# Altium PCB connector_pcb.PcbDoc
Units mm, origin at the board's own origin, x right, y up, seen from the top; angles counter-clockwise.
Board outline 127 x 38.1 mm, 2 copper layers (Top Layer, Bottom Layer); 77 components, 40 nets, 197 pads, 0 vias.
Unrouted connection lines stored in the file: 144.
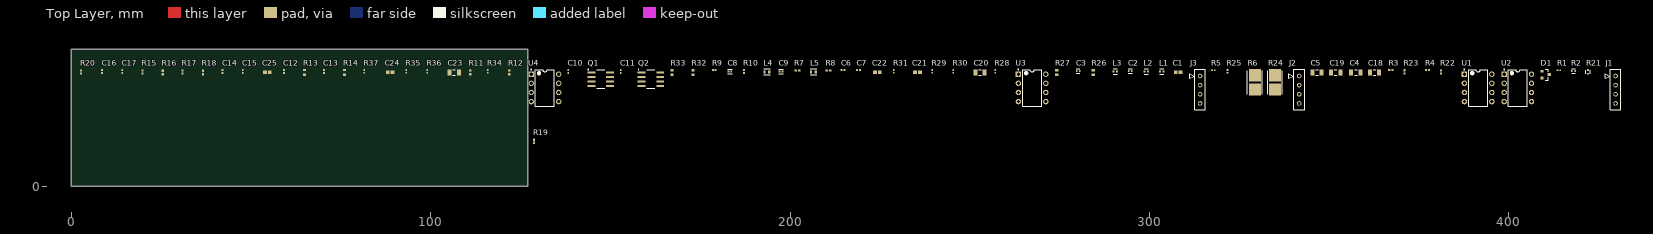
[diagram p0: Top Layer view]
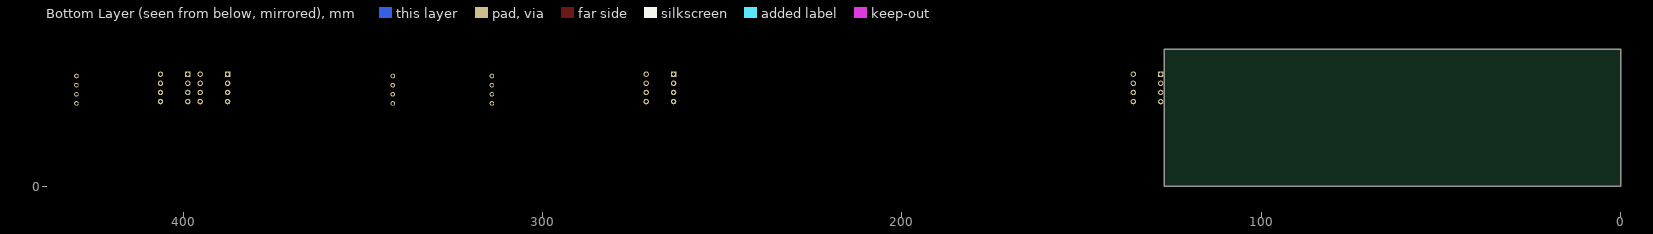
[diagram p1: Bottom Layer view, seen from below]

## Layer stack, top to bottom
Top Solder: solder mask 0.0102, Solder Resist, Dk 3.5
Top Layer: signal copper 0.0356
Dielectric 1: dielectric 0.32, FR-4, Dk 4.8
Bottom Layer: signal copper 0.0356
Bottom Solder: solder mask 0.0102, Solder Resist, Dk 3.5

## Board outline
0,0 127,0 127,38.1 0,38.1

## Design rules (kind name [scope] priority, off if disabled: settings)
Clearance [All] p1: gap=0.254 ignorepadtopadclearanceinfootprint=FALSE
PolygonConnect [All] p1: connectstyle=Relief reliefconductorwidth=0.254 reliefentries=4 polygonreliefangle="90 Angle" airgapwidth=0.254
RoutingVias [All] p1: holewidth=0.711 width=1.27 viastyle="Through Hole" minholewidth=0.711 minwidth=1.27 maxholewidth=0.711 maxwidth=1.27
SolderMaskExpansion [All] p1: expansion=0.102 istentingtop=FALSE
SupplyNets "Schematic Supply Nets_1" [InNet('GND')] p1: voltage=0.000
Width [All] p1: maxlimit=0.254 minlimit=0.254 preferedwidth=0.254
30 further rules are at their usual default settings.

## Components (designator, comment, footprint, x,y, rotation, side; value= is the part's Value field where it differs from the comment)
C1 "100p" CAPC1608X90X40ML10T20 307.975,31.623 r0 top
C2 "390p" FP-GRM155-0_05-MFG 294.64,32.004 r0 top
C3 "390p" FP-GRM155-0_05-MFG 280.162,32.004 r0 top
C4 "1u" CAPC3216X110X50LL20T25 357.378,31.623 r0 top
C5 "1u" CAPC3216X110X50LL20T25 346.583,31.623 r0 top
C6 "0.01u" CAPC1005X55X25LL05T10 214.757,32.258 r0 top
C7 "0.01u" CAPC1005X55X25LL05T10 219.075,32.258 r0 top
C8 "0.1u" FP-CL17-IPC_C 183.261,31.877 r0 top
C9 "0.1u" FP-CL17-IPC_C 197.485,31.877 r0 top
C10 "0.01u" CAPC1005X55X25LL05T10 138.303,31.877 r90 top
C11 "0.01u" CAPC1005X55X25LL05T10 152.908,31.877 r90 top
C12 "0.01u" CAPC1005X55X25LL05T10 59.182,31.877 r90 top
C13 "0.01u" CAPC1005X55X25LL05T10 70.358,31.877 r90 top
C14 "0.01u" CAPC1005X55X25LL05T10 42.164,31.877 r90 top
C15 "0.01u" CAPC1005X55X25LL05T10 47.752,31.877 r90 top
C16 "0.01u" CAPC1005X55X25LL05T10 8.636,31.877 r90 top
C17 "0.01u" CAPC1005X55X25LL05T10 14.224,31.877 r90 top
C18 "1u" CAPC3216X110X50LL20T25 362.585,31.623 r0 top
C19 "1u" CAPC3216X110X50LL20T25 351.79,31.623 r0 top
C20 "1u" CAPC3216X110X50LL20T25 252.857,31.623 r0 top
C21 "100p" CAPC1608X90X40ML10T20 235.458,31.623 r0 top
C22 "100p" CAPC1608X90X40ML10T20 224.282,31.623 r0 top
C23 "1u" CAPC3216X110X50LL20T25 106.553,31.623 r0 top
C24 "100p" CAPC1608X90X40ML10T20 88.773,31.623 r0 top
C25 "100p" CAPC1608X90X40ML10T20 54.61,31.623 r0 top
D1 "BAT54S-7-F" FP-SOT23-MFG 410.21,30.988 r0 top
J1 "PPTC041LFBN-RC" CONN_PPTC041LFBN-RC_SUL 429.641,30.607 r90 top
J2 "PPTC041LFBN-RC" CONN_PPTC041LFBN-RC_SUL 341.63,30.607 r90 top
J3 "PPTC041LFBN-RC" CONN_PPTC041LFBN-RC_SUL 314.071,30.607 r90 top
L1 "2u" FP-LQW15CA_00-MFG 303.403,31.877 r0 top
L2 "500n" FP-LQW15CA_00-MFG 299.085,31.877 r0 top
L3 "500n" FP-LQW15CA_00-MFG 290.449,31.877 r0 top
L4 "390n" FP-LQW18AN_00-MFG 193.548,31.75 r0 top
L5 "390n" FP-LQW18AN_00-MFG 206.502,31.75 r0 top
Q1 "HFA3101BZ" M8_15_MFG 147.32,29.718 r0 top
Q2 "HFA3101BZ" M8_15_MFG 161.29,29.718 r0 top
R1 "24" RESC1005X40X25LL05T10 413.893,32.258 r0 top
R2 "3.3k" FP-ERA2A-MFG 417.957,32.004 r0 top
R3 "75k" RESC1005X40X25NL10T10 367.157,32.258 r0 top
R4 "100" RESC1005X40X25NL05T10 377.317,32.258 r0 top
R5 "1k" RESC1005X40X25LL05T10 317.754,32.258 r0 top
R6 "50" FP-ALN2512-MFG 329.311,28.829 r90 top
R7 "51" RESC1005X40X25ML05T10 202.057,32.131 r0 top
R8 "51" RESC1005X40X25ML05T10 210.693,32.131 r0 top
R9 "2k" RESC1005X40X25LL10T10 178.943,32.258 r0 top
R10 "2k" RESC1005X40X25LL10T10 187.198,31.877 r90 top
R11 "110" RESC1005X40X25ML05T05 110.998,31.623 r90 top
R12 "110" RESC1005X40X25ML05T05 121.92,31.623 r90 top
R13 "300" RESC1608X55X25LL10T15 64.897,31.623 r90 top
R14 "300" RESC1608X55X25LL10T15 76.073,31.623 r90 top
R15 "220" RESC1005X40X25NL05T10 19.812,31.75 r90 top
R16 "51" RESC1005X40X25ML05T10 25.527,31.623 r90 top
R17 "220" RESC1005X40X25NL05T10 30.988,31.75 r90 top
R18 "51" RESC1005X40X25ML05T10 36.703,31.623 r90 top
R19 "27" RESC1005X40X25NL05T10 128.778,12.446 r90 top
R20 "27" RESC1005X40X25NL05T10 2.794,31.75 r90 top
R21 "3.3k" FP-ERA2A-MFG 422.021,31.75 r90 top
R22 "100" RESC1005X40X25NL05T10 381.127,31.75 r90 top
R23 "75k" RESC1005X40X25NL10T10 370.967,31.75 r90 top
R24 "50" FP-ALN2512-MFG 334.899,28.829 r90 top
R25 "1k" RESC1005X40X25LL05T10 321.691,31.877 r90 top
R26 "5.9k" RESC1608X55X30LL15T15 284.353,31.623 r90 top
R27 "5.9k" RESC1608X55X30LL15T15 274.193,31.623 r90 top
R28 "10k" RESC1005X40X25LL05T10 257.048,31.877 r90 top
R29 "10k" RESC1005X40X25LL05T10 239.522,31.877 r90 top
R30 "10k" RESC1005X40X25LL05T10 245.364,31.877 r90 top
R31 "10k" RESC1005X40X25LL05T10 228.854,31.877 r90 top
R32 "5.9k" RESC1608X55X30LL15T15 172.974,31.623 r90 top
R33 "5.9k" RESC1608X55X30LL15T15 167.132,31.623 r90 top
R34 "10k" RESC1005X40X25LL05T10 115.951,31.877 r90 top
R35 "10k" RESC1005X40X25LL05T10 93.218,31.877 r90 top
R36 "10k" RESC1005X40X25LL05T10 99.06,31.877 r90 top
R37 "10k" RESC1005X40X25LL05T10 81.534,31.877 r90 top
U1 "LM741CN/NOPB" P0008A 391.414,27.305 r0 top
U2 "LM741CN/NOPB" P0008A 402.463,27.305 r0 top
U3 "LM741CN/NOPB" P0008A 267.335,27.305 r0 top
U4 "LM741CN/NOPB" P0008A 131.826,27.305 r0 top

## Footprints (in the part's own frame and the unit in brackets; to place one, negate y for a bottom-side part, rotate by r counter-clockwise, add the part's x,y. Pads: shape width x height; smd on the part's side, far side on the other; paste and mask are expansions set on the pad)
CAPC1005X55X25LL05T10 [mm] "Chip Capacitor, 2-Leads, Body 1.05x0.55mm, IPC High Density"
  rect 0.56x0.52 smd: 1(-0.39,0) 2(0.39,0)
  body extent -0.53,-0.28 0.53,0.28, height 0.55
CAPC1608X90X40ML10T20 [mm] "Chip Capacitor, 2-Leads, Body 1.7x0.9mm, IPC Low Density"
  rect 1.05x1.05 smd: 1(-0.675,0) 2(0.675,0)
  body extent -0.85,-0.45 0.85,0.45, height 0.9
CAPC3216X110X50LL20T25 [mm] "Chip Capacitor, 2-Leads, Body 3.20x1.60mm, IPC High Density"
  rect 1.1x1.7 smd: 1(-1.3,0) 2(1.3,0)
  silkscreen extent -0.35,-0.75 0.35,0.75, body extent -1.7,-0.9 1.7,0.9, height 1.1
CONN_PPTC041LFBN-RC_SUL [mil]
  round 50 / inner round 60 / far side round 50 hole 30 paste-99999 mask+0: 1(0,0) 2(-100,0) 3(-200,0) 4(-300,0)
  silkscreen extent -372,-59 72,114
FP-ALN2512-MFG [mm]
  rect 3.4x3.3 smd paste+0 mask+0: 1(-2.005,0) 2(2.005,0)
  silkscreen extent -3.25,-2.09 3.24,2.07, body extent -3.8,-1.75 3.8,1.75, height 0.25
FP-CL17-IPC_C [mm]
  rect 0.515x0.472 smd paste+0 mask+0: 1(-0.379,0) 2(0.379,0)
  silkscreen extent -0.64,-0.67 0.64,0.67, body extent -0.74,-0.38 0.74,0.38, height 0.25
FP-ERA2A-MFG [mm]
  rect 0.475x0.5 smd paste+0 mask+0: 1(-0.512,0) 2(0.512,0)
  silkscreen extent -0.5,-0.63 0.5,0.63, body extent -0.85,-0.4 0.85,0.4, height 0.25
FP-GRM155-0_05-MFG [mm]
  rect 0.4x0.5 smd paste+0 mask+0: 1(-0.4,0) 2(0.4,0)
  silkscreen extent -0.5,-0.65 0.5,0.65, body extent -0.7,-0.38 0.7,0.38, height 0.25
FP-LQW15CA_00-MFG [mm]
  rect 0.5x0.64 smd paste+0 mask+0: 1(-0.475,0) 2(0.475,0)
  silkscreen extent -0.56,-0.72 0.56,0.72, body extent -0.82,-0.42 0.82,0.42, height 0.25
FP-LQW18AN_00-MFG [mm]
  rect 0.625x0.85 smd paste+0 mask+0: 1(-0.663,0) 2(0.663,0)
  silkscreen extent -0.9,-0.82 0.9,0.82, body extent -1.07,-0.6 1.07,0.6, height 0.25
FP-SOT23-MFG [mm]
  rect 0.9x0.8 smd paste+0 mask+0: 1(-1,0.95) 2(-1,-0.95) 3(1,0)
  silkscreen extent -0.18,-1.5 0.7,1.5, body extent -1.55,-1.6 1.55,1.6, height 0.25
M8_15_MFG [mm] "Recommended Land Pattern"
  rect 2.2x0.6 smd: 1(-2.6,1.905) 2(-2.6,0.635) 3(-2.6,-0.635) 4(-2.6,-1.905) 5(2.6,-1.905) 6(2.6,-0.635) 7(2.6,0.635) 8(2.6,1.905)
  silkscreen extent -3.57,-2.56 1.12,2.83, body extent -3.8,-2.75 3.8,2.75, height 0.25
P0008A [mm] "DIP, 8-Leads, Body 10.15x6.6mm, Pitch 2.54mm"
  rect 1.5x1.5 hole 0.9: 1(-3.81,3.81)
  round 1.5 hole 0.9: 2(-3.81,1.27) 3(-3.81,-1.27) 4(-3.81,-3.81) 5(3.81,-3.81) 6(3.81,-1.27) 7(3.81,1.27) 8(3.81,3.81)
  silkscreen extent -3.93,-5.1 2.65,5.23, body extent -3.95,-5.07 3.95,5.07, height 5.08
RESC1005X40X25LL05T10 [mm] "Chip Resistor, 2-Leads, Body 1.00x0.50mm, IPC High Density"
  rect 0.5x0.45 smd: 1(-0.375,0) 2(0.375,0)
  body extent -0.53,-0.27 0.53,0.28, height 0.4
RESC1005X40X25LL10T10 [mm] "Chip Resistor, 2-Leads, Body 1.00x0.50mm, IPC High Density"
  rect 0.55x0.5 smd: 1(-0.375,0) 2(0.375,0)
  body extent -0.55,-0.3 0.55,0.3, height 0.4
RESC1005X40X25ML05T05 [mm] "Chip Resistor, 2-Leads, Body 1.00x0.50mm, IPC Low Density"
  rect 0.65x0.65 smd: 1(-0.5,0) 2(0.5,0)
  body extent -0.53,-0.27 0.53,0.28, height 0.4
RESC1005X40X25ML05T10 [mm] "Chip Resistor, 2-Leads, Body 1.00x0.50mm, IPC Low Density"
  rect 0.7x0.65 smd: 1(-0.475,0) 2(0.475,0)
  body extent -0.53,-0.27 0.53,0.28, height 0.4
RESC1005X40X25NL05T10 [mm] "Chip Resistor, 2-Leads, Body 1.00x0.50mm, IPC Medium Density"
  rect 0.6x0.55 smd: 1(-0.425,0) 2(0.425,0)
  body extent -0.53,-0.27 0.53,0.28, height 0.4
RESC1005X40X25NL10T10 [mm] "Chip Resistor, 2-Leads, Body 1.00x0.50mm, IPC Medium Density"
  rect 0.65x0.6 smd: 1(-0.425,0) 2(0.425,0)
  body extent -0.55,-0.3 0.55,0.3, height 0.4
RESC1608X55X25LL10T15 [mm] "Chip Resistor, 2-Leads, Body 1.60x0.80mm, IPC High Density"
  rect 0.6x0.8 smd: 1(-0.65,0) 2(0.65,0)
  body extent -0.85,-0.45 0.85,0.45, height 0.55
RESC1608X55X30LL15T15 [mm] "Chip Resistor, 2-Leads, Body 1.60x0.80mm, IPC High Density"
  rect 0.7x0.85 smd: 1(-0.625,0) 2(0.625,0)
  body extent -0.87,-0.48 0.87,0.48, height 0.55

## Part data
C1 C21 C22 C24 C25: library part CMP-2100-03594-1, "Chip Capacitor, 100 pF, +/- 5%, 50 V, -55 to 125 degC, 0603 (1608 Metric), RoHS, Tape and Reel", Capacitance=100pF, Case Code (Imperial)=0603, Case Code (Metric)=1608, Dielectric=C0G, Insulation Resistance=100GR, Manufacturer=Yageo, Max Operating Temperature=125degC, Min Operating Temperature=-55degC, Package Description="2-Pin Surface Mount Device, Body 1.6 x 0.8 mm", Package Quantity=1, Temperature Coefficient=30ppm/degC, Tolerance=5%, Voltage=50V, Case/Package=0603, Composition=Ceramic, Datasheet URL=http://www.yageo.com/documents/recent/UPY-GP_NP0_16V-to-50V_14.pdf, Datasheet Version="Rev. 14, 07/2016", Depth=0.8mm, Height=0.8mm, Lead Free=LeadFree, Length=1.6mm, Manufacturer URL=http://www.yageo.com/, Mount=SurfaceMount, Number of Pins=2, Package Reference=0603, Packaging=TapeandReel, Radiation Hardening=No, REACH SVHC=Unknown, RoHSCompliant=True, Termination=SMD/SMT, Thickness=0.035inch, Voltage Rating=50V, Voltage Rating (DC)=50V, Width=0.8mm
C2 C3: library part CMP-2008-04345-2, "Chip Multilayer Ceramic Capacitors for General Purpose, 0402, 390pF, C0G, 30ppm/°C, 5%, 50V", Capacitance=390pF, Case Code (Imperial)=0402, Case Code (Metric)=1005, Dielectric=C0G, Max Operating Temperature=125°C, Min Operating Temperature=-55°C, Package Quantity=1, Temperature Coefficient=30ppm/°C, Tolerance=5%, Voltage=50V, Case/Package=0402, Depth=0.5mm, Height=0.5mm, Lead Free="Lead Free", Length=1mm, Material=Ceramic, Mount="Surface Mount", Packaging="Tape and Reel", Radiation Hardening=No, REACH SVHC="No SVHC", Termination=SMD/SMT, Thickness=0.022inch, Voltage Rating=50V, Voltage Rating (DC)=50V, Width=0.02inch
C4 C5 C18 C19 C20 C23: library part CMP-2000-06011-1, "Chip Capacitor, 1 uF, +/- 10%, 50 V, -55 to 125 degC, 1206 (3216 Metric), RoHS, Tape and Reel", Capacitance=1uF, Capacitance - nF=1000nF, Case Code - in=1206, Case Code - mm=3216, Case Height=1mm, Case Length=3.2mm, Case Width=1.6mm, Dielectric=X7R, Manufacturer=Kemet, Maximum Operating Temperature=+125C, Minimum Operating Temperature=-55C, Operating Temperature Range=-55Cto+125C, Package / Case=1206(3216metric), Package Description="2-Pin Surface Mount Device, Body 3.2 x 1.6 mm", Temperature Coefficient / Code=+/-15%, Tolerance=10%, Voltage Rating=50V, Brand=Kemet, Class=Class1, Datasheet URL=http://www.kemet.com/docfinder?Partnumber=C1206C105K5RACTU, Datasheet Version=02/2016, Dimensions=1.6mmWx3.2mmLx1mmH, Factory Pack Quantity=2500, Manufacturer URL=http://www.kemet.com/, Mounting Technology=SurfaceMount, Package Reference=1206, Packaging=Reel, Product=GeneralTypeMLCCs, Product Category=MultilayerCeramicCapacitorsMLCC-SMD/SMT, RoHS=Details, Series=C1206C, Termination Style=SMD/SMT, Type=SMDMLCCX7R6.3-250VDCCommericalGrade, Voltage Rating DC=50V
C6 C7 C10 C11 C12 C13 C14 C15 C16 C17: library part CMP-2000-06332-1, "Chip Capacitor, 10 nF, 16 V, 10%, -55 to 125 degC, 0402 (1005 Metric), RoHS, Tape and Reel", Capacitance=10000pF, Case Size/Dimension=0402, Dielectric=X7R, Manufacturer=Murata, Package Description="2-Pin Surface Mount Device, Body 1 x 0.5 mm", Rated Voltage=16V, Tolerance (%)=±10%, Datasheet URL=http://psearch.en.murata.com/capacitor/product/GRM155R71C103KA01%23.pdf, Datasheet Version=06/2016, Manufacturer URL=http://www.murata.com/, Mounting Technology=SurfaceMount, Package Reference=0402
C8 C9: library part CMP-13271-001069-1, "Cap Ceramic 100nF 10V X7R ±10% SMD 0402 +125°C Paper T/R", Capacitance=100nF, Case Code (Imperial)=0402, Case Code (Metric)=1005, Dielectric=X7R, Max Operating Temperature=125°C, Min Operating Temperature=-55°C, Package Quantity=1, Tolerance=10%, Voltage Rating=10V, Case/Package=0402, Contact Plating=Tin, Depth=0.5mm, Height=0.5mm, Length=1mm, Mount="Surface Mount", Packaging="Tape and Reel", Radiation Hardening=No, Thickness=0.022inch, Width=0.02inch
D1: library part CMP-1667-00006-2, "DIODE ARRAY SCHOTTKY 30V SOT23-3", Average Rectified Current=200mA, Capacitance=10pF, Case/Package=SOT-23, Forward Voltage=800mV, Max Forward Surge Current (Ifsm)=600mA, Max Operating Temperature=150°C, Max Power Dissipation=200mW, Max Repetitive Reverse Voltage (Vrrm)=30V, Min Operating Temperature=-65°C, Package Quantity=3000, Peak Reverse Current=2uA, Contact Plating=Tin, Current Rating=200mA, Forward Current=200mA, Height=1mm, Lead Free="Lead Free", Length=2.9mm, Max Reverse Voltage (DC)=30V, Mount="Surface Mount", Number of Pins=3, Packaging="Tape and Reel", Peak Non-Repetitive Surge Current=600mA, Power Dissipation=200mW, Power Rating=200mW, Radiation Hardening=No, REACH SVHC="No SVHC", Reverse Recovery Time=5ns, Termination=SMD/SMT, Voltage Rating (DC)=30V, Weight=0.000282oz, Width=1.3mm
J1 J2 J3: "No Description Available", Mfr_Name=Sullins, RefDes=RefDes, Type=Type
L1: library part CMP-06042-013572-1, "Wire Wound Ferrite Inductor for General Circuits 2000nH ±10% 130mA 3.2Ω 0402 (1005)", Case/Package=Nonstandard, Current Rating=130mA, DC Resistance (DCR)=3.2R, Inductance=2uH, Max Operating Temperature=125°C, Min Operating Temperature=-40°C, Resistor Type=Wirewound, Self Resonant Frequency=120MHz, Test Frequency=10MHz, Tolerance=10%, Core Material=Ferrite, Height - Seated (Max)=0.026inch, Length=0.04inch, Mount="Surface Mount", Packaging="Tape and Reel", Shielding=Unshielded, Width=0.022inch
L2 L3: library part CMP-06042-006025-1, "Wire Wound Ferrite Inductor for General Circuits 500nH ±5% 270mA 0.97Ω 0402 (1005)", Case/Package=Nonstandard, Current Rating=270mA, DC Resistance (DCR)=970mR, Inductance=500nH, Max Operating Temperature=125°C, Min Operating Temperature=-40°C, Resistor Type=Wirewound, Self Resonant Frequency=900MHz, Test Frequency=10MHz, Tolerance=5%, Core Material=Ferrite, Height - Seated (Max)=0.026inch, Length=0.04inch, Mount="Surface Mount", Packaging="Cut Tape", Shielding=Unshielded, Width=0.022inch
L4 L5: library part CMP-06042-005178-1, "Wire Wound RF Inductor 390nH ±5% 80mA 6.2Ω 0603 (1608)", Case Code (Imperial)=0603, Case Code (Metric)=1608, Current Rating=80mA, DC Resistance (DCR)=6.2R, Inductance=390nH, Max Operating Temperature=125°C, Min Operating Temperature=-55°C, Package Quantity=4000, Resistor Type=Wirewound, Self Resonant Frequency=800MHz, Test Frequency=100MHz, Tolerance=5%, Case/Package=0603, Core Material=Non-Magnetic, DC Current=80mA, Depth=1mm, Height=0.8mm, Height - Seated (Max)=0.039inch, Lead Free="Lead Free", Length=1.6mm, Max DC Current=80mA, Military Standard=Not, Mount="Surface Mount", Packaging="Tape and Reel", Q Factor=30, Radiation Hardening=No, Shielding=Unshielded, Termination=SMD/SMT, Weight=0.000106oz, Width=0.031inch
Q1 Q2: library part CMP-00572-88252381-1, "HFA3096 Series NPN 12 Vce 10 Ghz UHF Transistor Array - SOIC-8", Case/Package=SOIC, Collector Base Voltage (VCBO)=12V, Collector Emitter Breakdown Voltage=8V, Continuous Collector Current=30mA, Emitter Base Voltage (VEBO)=5.5V, Manufacturer Lifecycle Status=ACTIVE, Max Frequency=10GHz, Max Operating Temperature=85°C, Min Operating Temperature=-40°C, Bandwidth=900MHz, Collector Emitter Voltage (VCEO)=8V, ComponentLink1Description="Manufacturer's Website", ComponentLink1URL=http://www.renesas.com, ComponentLink2Description="Datasheet URL", ComponentLink2URL=https://octopart.com/cad-content/api/get-model-datasheet/15189/88252381, ComponentLink3Description="Manufacturer's Package Drawing", ComponentLink3URL=https://www.renesas.com/en/document/psc/m815-8-lead-narrow-body-small-outline-plastic-package, Contact Plating=Tin, Current Rating=30mA, Gain Bandwidth Product=10GHz, Height=0m, HelpURL=https://octopart.com/cad-content/api/get-model-datasheet/15189/88252381, Lead Free="Lead Free", Length=4.9mm, Lifecycle Status=Production, Max Collector Current=30mA, Mount="Surface Mount", Noise Figure=3.5dB, Number of Pins=8, Packaging=Bulk, Pitch=1.3mm, Polarity=NPN, Radiation Hardening=No, REACH SVHC="No SVHC", RoHS=Compliant, Schedule B=8542330000, Transition Frequency=10GHz, Voltage Rating (DC)=8V, Width=3.9mm
R1: library part CMP-1011-00035-2, Manufacturer=Yageo, Part Number=RC0402JR-0724RL
R2 R21: library part CMP-2002-05884-2, Case Code (Imperial)=0402, Case Code (Metric)=1005, Max Operating Temperature=155°C, Max Power Dissipation=63mW, Min Operating Temperature=-55°C, Resistance=3.3kΩ, Temperature Coefficient=25ppm/°C, Tolerance=0.1%, Voltage Rating=25V, Case/Package=0402, Composition="Thin Film", Contact Plating=Tin, Depth=500µm, Height=350µm, Lead Free="Lead Free", Length=1mm, Lifecycle Status=Production, Military Standard=Not, Mount="Surface Mount", NexarPartId=9251384, Number of Pins=2, Number of Terminations=2, Packaging="Cut Tape", Power Rating=63mW, Radiation Hardening=No, REACH SVHC="No SVHC", RoHS=Compliant, Schedule B="8533210045, 8533210045", Termination=SMD/SMT, Voltage Rating (DC)=25V, Weight=793.786648µg, Width=500µm
R3 R23: library part CMP-2002-05825-1, Manufacturer=Panasonic, Part Number=ERA-2AEB753X
R4 R22: library part CMP-2002-07914-1, Manufacturer="Yageo / Phycomp", Part Number=RC0402JR-07100RL
R5 R25: library part CMP-2002-07941-1, Manufacturer="Yageo / Phycomp", Part Number=RC0402JR-071KL
R6 R24: library part CMP-33361-000037-1, "2512 CHIP ALNI 50 OHMS 1%", RoHS Compliant=Yes
R7 R8 R16 R18: library part CMP-2002-08019-1, Manufacturer="Yageo / Phycomp", Part Number=RC0402JR-0751RL
R9 R10: library part CMP-2002-05790-1, Manufacturer=Panasonic, Part Number=ERA-2AEB202X
R11 R12: library part CMP-2002-00438-1, Manufacturer=Panasonic, Part Number=ERJ-2GEJ111X
R13 R14: library part CMP-2000-06958-1, "Chip Resistor, 330 Ohm, +/- 5%, 50 V, -55 to 155 degC, 0603 (1608 Metric), -40 to 155 degC, RoHS, Tape and Reel", Manufacturer=Yageo, Package Description="2-Pin Surface Mount Device, Body 1.6 x 0.8 mm", Package Reference=0603, Power Rating=100mW, Resistance=330ohm, Resistance Tolerance=±5%, Resistor Case Style=0603[1608Metric], Resistor Element Type=ThickFilm, Temperature Coefficient=±100ppm/°C, Voltage Rating=50V, Automotive Qualification Standard=-, Datasheet URL=http://www.yageo.com/documents/recent/PYu-RC_Group_51_RoHS_L_7.pdf, Datasheet Version="Rev. 7, 05/2017", Manufacturer URL=http://www.yageo.com/, Mounting Technology=SurfaceMount, MSL=MSL1-Unlimited, Packaging=CutTape, Product Range=RCSeries, SVHC=ToBeAdvised
R15 R17: library part CMP-2002-07959-1, Manufacturer="Yageo / Phycomp", Part Number=RC0402JR-07220RL
R19 R20: library part CMP-1011-00036-2, Manufacturer="Yageo / Phycomp", Part Number=RC0402JR-0727RL
R26 R27 R32 R33: library part CMP-2000-00580-1, Manufacturer=Panasonic, Part Number=ERJ-3EKF5901V
R28 R29 R30 R31 R34 R35 R36 R37: library part CMP-2002-07353-1, Manufacturer="Yageo / Phycomp", Part Number=RC0402FR-0710KL
U1 U2 U3 U4: library part CMP-0055-00162-3, "Operational Amplifier, 8-pin MDIP, Pb-Free", Manufacturer="Texas Instruments", Package Reference=P0008A, PackageTopMarking=NSUZXYTTE#*LM*741CN, PowerWise=N, Code_JEDEC=MS-001-BA, ComponentLink1Description="Datasheet URL", ComponentLink1URL=http://www.ti.com/general/docs/lit/getliterature.tsp?genericPartNumber=LM741&fileType=pdf, CompType=Amplifiers, PackageDescription="MDIP, .365 x .250 x .130in, 8 Lead, .100in Pitch", PinCount=8, RoHS=Y

## Nets (pads, with @x,y where several pads share a name; then routed paths per layer and width w, separated by ;. In a path a pad name is that pad's centre, name@x,y a point inside that pad or via, vN(x,y) a via of type N, cw(c..) or ccw(c..) an arc to the next point about the centre after c; other vN are vias at no path point)
GND: C2.2 C3.2 C8.2 C9.2 C10.1 C11.1 C12.1 C13.1 C16.1 C17.1 C21.1 C24.1 D1.3 J1.3 J1.4 J2.4 J3.4 L2.2 L3.2 R4.1 R5.1 R6.2 R15.1 R17.1 R19.1 R20.1 R22.1 R24.2 R25.1 R26.2 R31.1 R32.2 R37.1 U1.4 U2.4 U3.4 U4.4
NetC1_1: C1.1 C3.1 J1.1 J1.2 L3.1
NetC1_2: C1.2 L1.1
NetC2_1: C2.1 L1.2 L2.1 R1.1
NetC4_1: C4.1 R2.2 U1.6
NetC4_2: C4.2 R6.1
NetC5_1: C5.1 C23.1 L4.2 Q1.5 R9.1
NetC5_2: C5.2 R3.1 R5.2 U1.3
NetC6_1: C6.1 J2.2
NetC6_2: C6.2 Q1.7 R7.2
NetC7_2: C7.2 Q2.7 R8.2
NetC8_1: C8.1 C9.1 J3.2 L4.1 L5.1 Q1.6 Q2.6 R3.2 R9.2 R10.2 R23.2 R28.2 R34.2 U1.7 U2.7 U3.7 U4.7
NetC10_2: C10.2 R11.2
NetC11_2: C11.2 R12.2
NetC12_2: C12.2 Q1.8 R7.1 R11.1 R13.2
NetC13_2: C13.2 Q2.8 R8.1 R12.1 R14.2
NetC14_1: C14.1 C15.1 D1.1
NetC14_2: C14.2 Q1.4 R16.2
NetC15_2: C15.2 Q2.4 R18.2
NetC16_2: C16.2 Q1.1 Q1.2 Q1.3 R13.1 R15.2 R16.1 R19.2
NetC17_2: C17.2 Q2.1 Q2.2 Q2.3 R14.1 R17.2 R18.1 R20.2
NetC18_1: C18.1 R21.2 U2.6
NetC18_2: C18.2 C20.1 R24.1
NetC19_1: C19.1 L5.2 Q2.5 R10.1
NetC19_2: C19.2 R23.1 R25.2 U2.3
NetC20_2: C20.2 R28.1 R29.2 R31.2
NetC21_2: C21.2 R30.1 U3.3
NetC22_1: C22.1 R29.1 R30.2
NetC22_2: C22.2 J3.3 R27.1 U3.6
NetC23_2: C23.2 R34.1 R35.2 R37.2
NetC24_2: C24.2 R36.1 U4.3
NetC25_1: C25.1 R35.1 R36.2
NetC25_2: C25.2 J3.1 R33.1 U4.6
NetD1_2: D1.2 R1.2
NetJ2_1: J2.1
NetJ2_3: J2.3
NetR2_1: R2.1 R4.2 U1.2
NetR21_1: R21.1 R22.2 U2.2
NetR26_1: R26.1 R27.2 U3.2
NetR32_1: R32.1 R33.2 U4.2
pads on no net: C7.1 U1.1 U1.5 U1.8 U2.1 U2.5 U2.8 U3.1 U3.5 U3.8 U4.1 U4.5 U4.8